# Altium PCB PCB1.PcbDoc
Units mm, origin at the board's own origin, x right, y up, seen from the top; angles counter-clockwise.
Board outline 58.5 x 41 mm, 2 copper layers (Top Layer, Bottom Layer); 36 components, 22 nets, 142 pads, 10 vias.
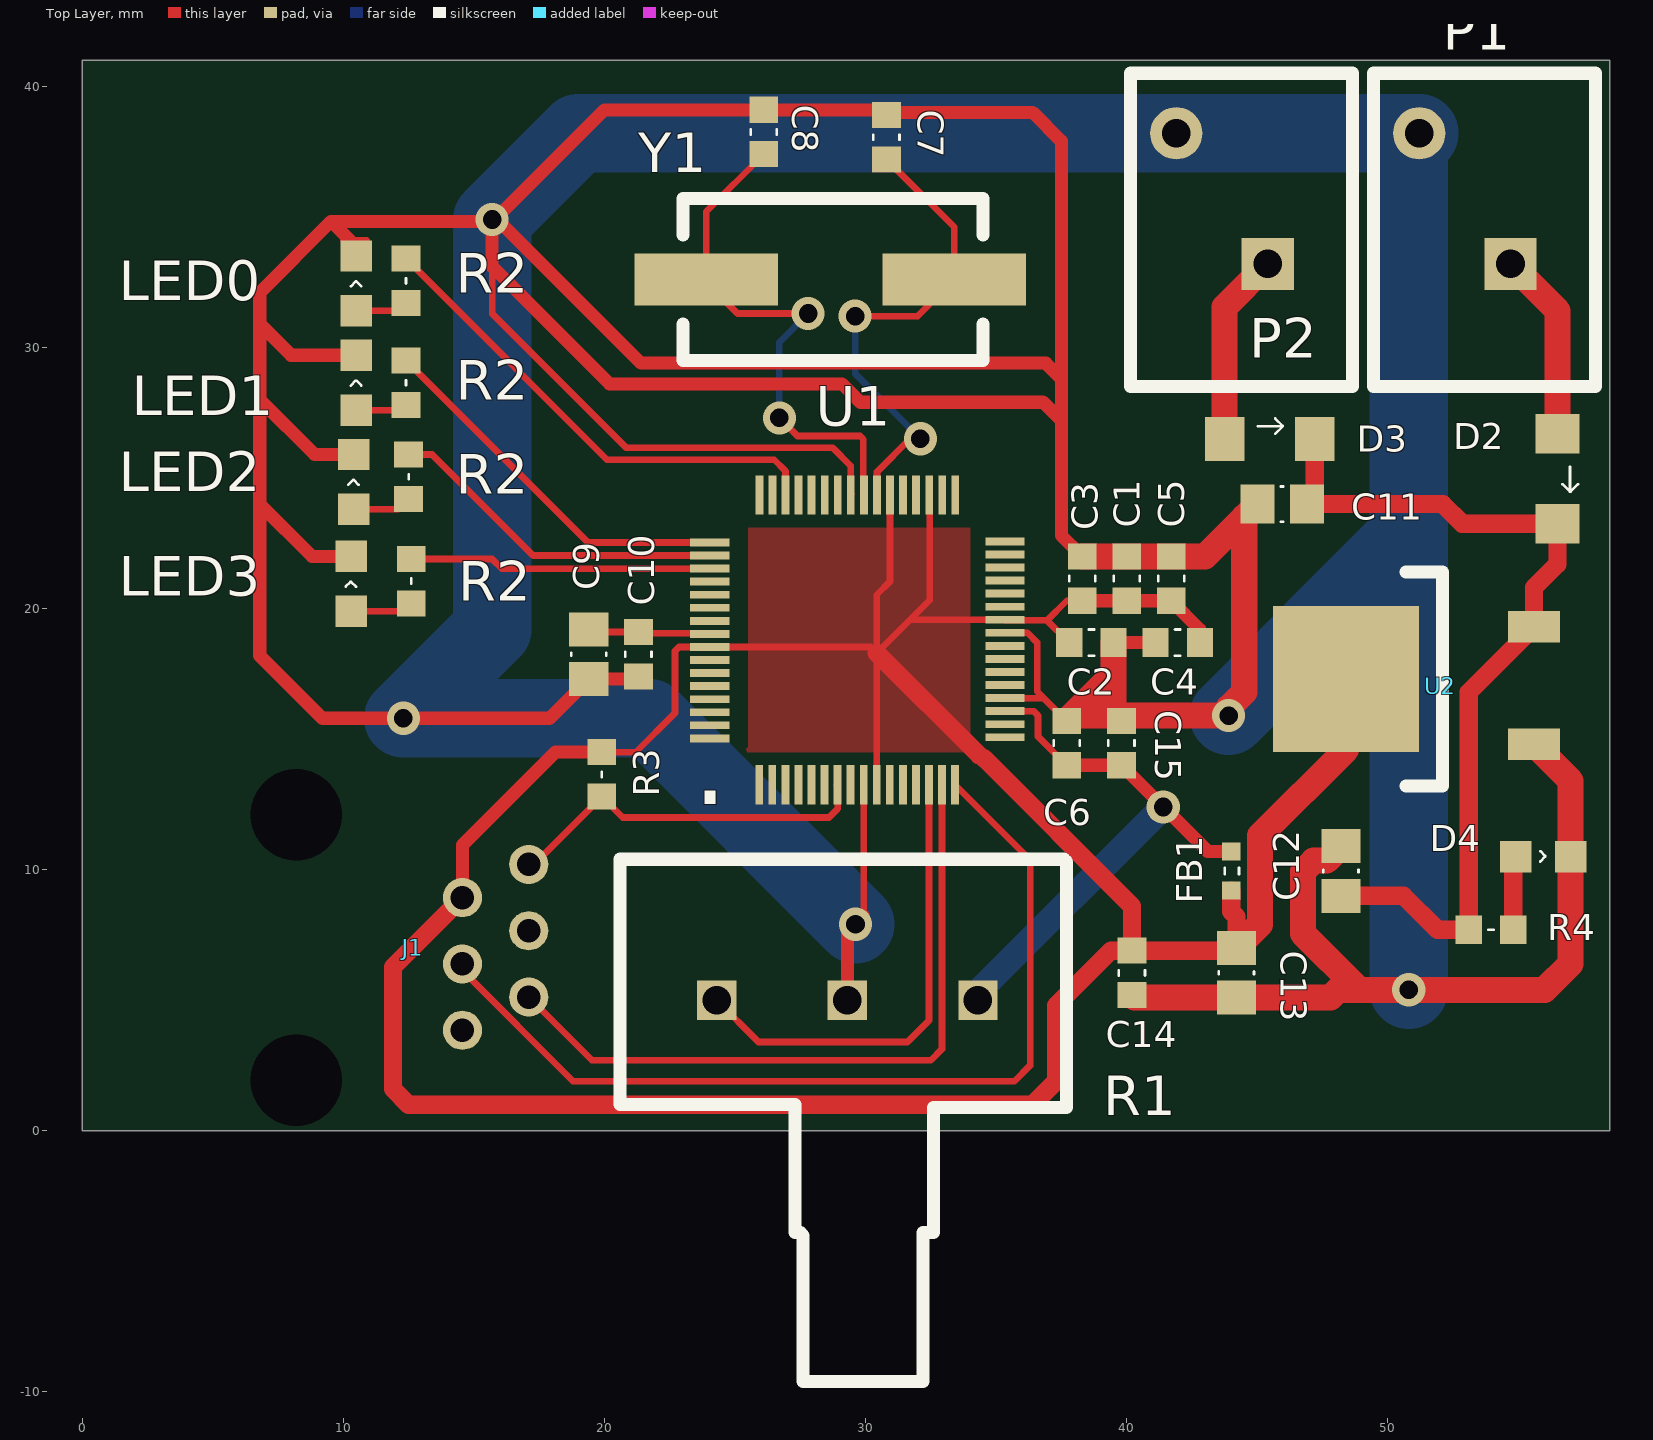
[diagram p0: Top Layer view]
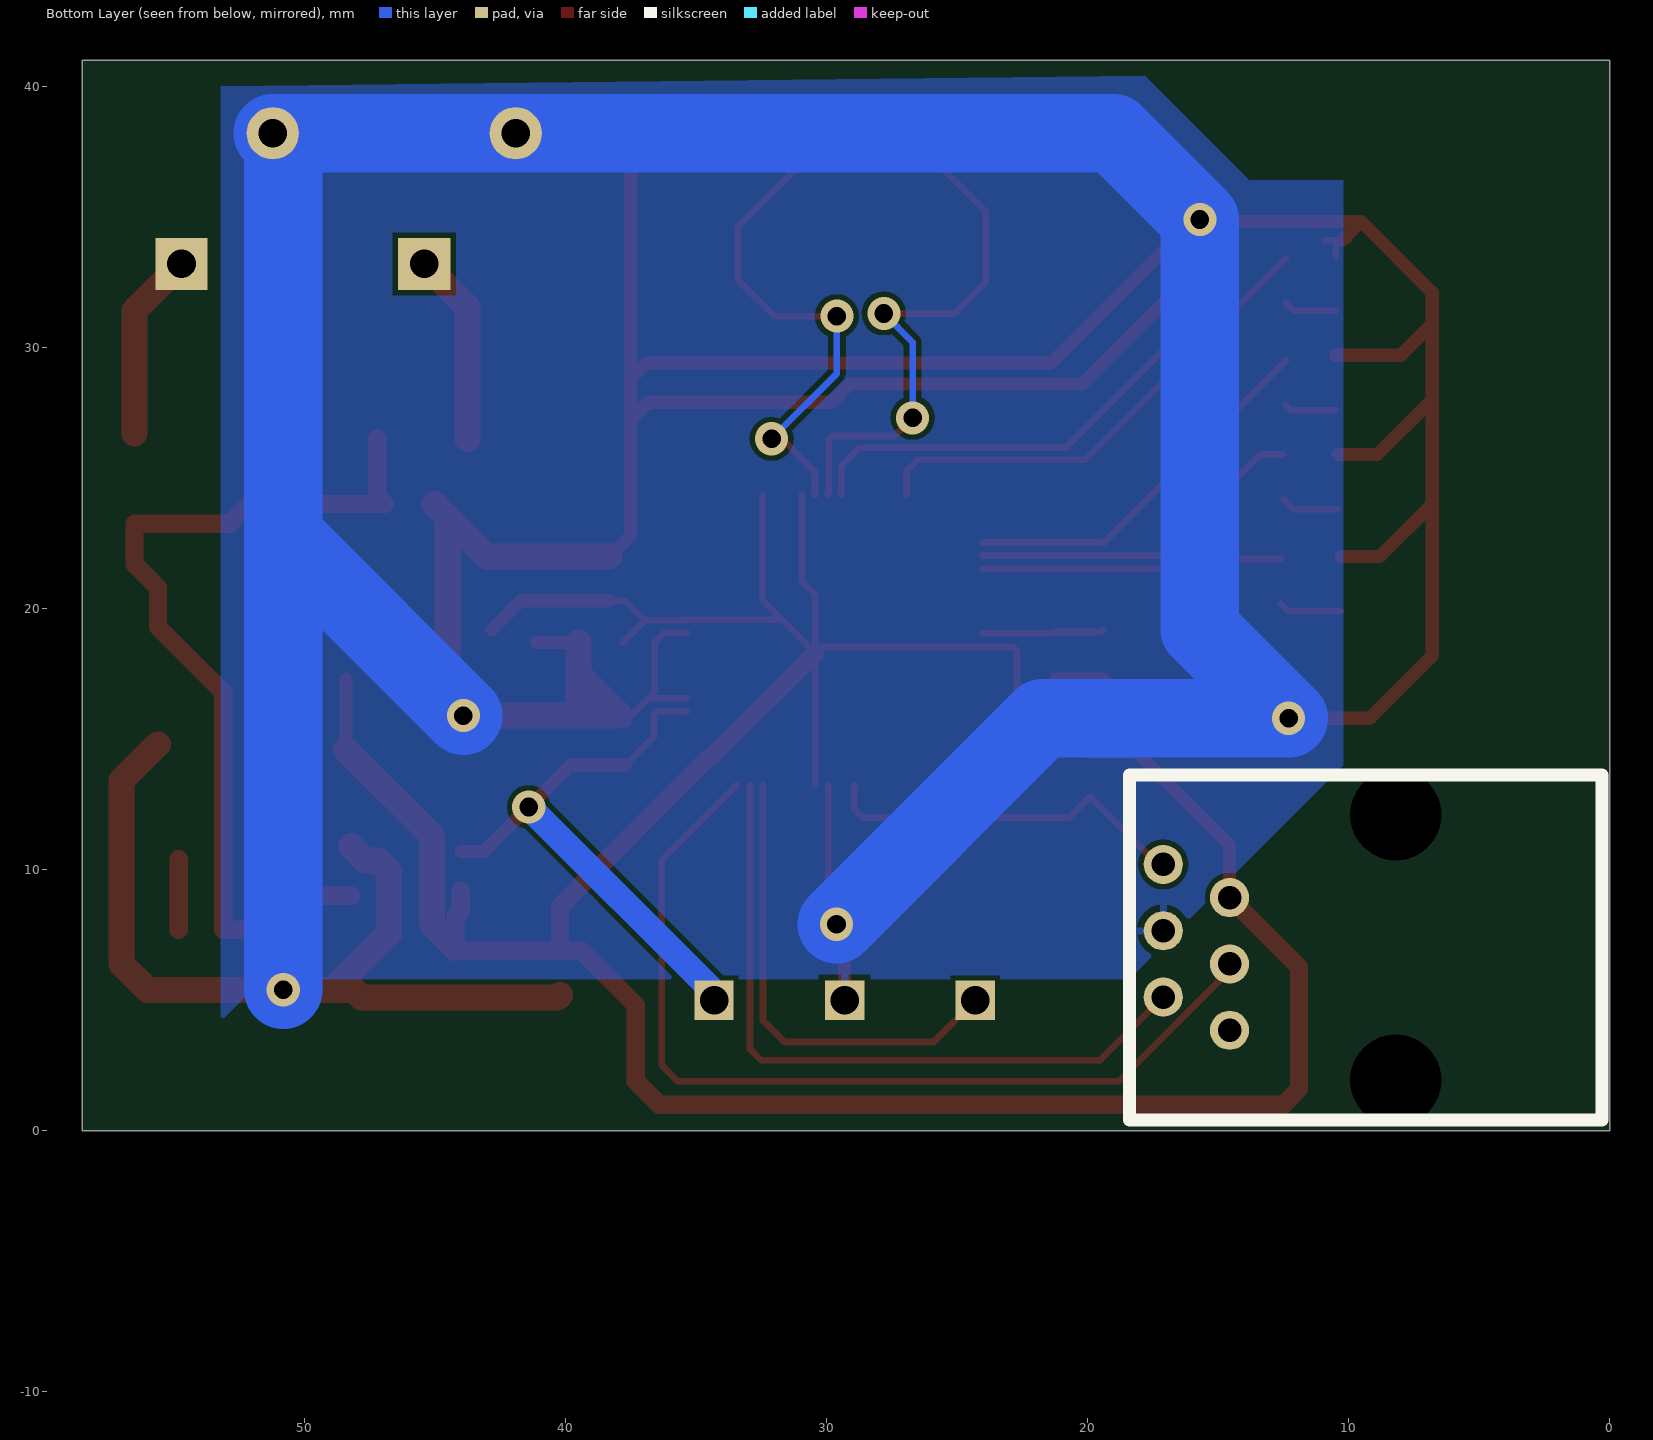
[diagram p1: Bottom Layer view, seen from below]

## Layer stack, top to bottom
Top Solder: solder mask 0.0102, Solder Resist, Dk 3.5
Top Layer: signal copper 0.0356
Dielectric 1: dielectric 0.32, FR-4, Dk 4.8
Bottom Layer: signal copper 0.0356
Bottom Solder: solder mask 0.0102, Solder Resist, Dk 3.5

## Board outline
0,0 58.5,0 58.5,41 0,41

## Design rules (kind name [scope] priority, off if disabled: settings)
Clearance [All] p1: gap=0.2
HoleSize [All] p1: absolutevalues=TRUE maxlimit=5 minlimit=0.3 maxpercent=80.000 minpercent=20.000
PolygonConnect [All] p1: connectstyle=Relief reliefconductorwidth=0.254 reliefentries=4 polygonreliefangle="90 Angle" airgapwidth=0.254
RoutingVias [All] p1: holewidth=0.711 width=1.27 viastyle="Through Hole" minholewidth=0.3 minwidth=1.27 maxholewidth=5 maxwidth=1.27
SilkToSilkClearance [All] p1: silktosilkclearance=0.1
SilkToSolderMaskClearance [IsPad] p1: minsilkscreentomaskgap=0.2 clearancetoexposedcopper=TRUE
SolderMaskExpansion [All] p1: expansion=0.102
UnpouredPolygon [All] p1: allowunpoured=FALSE
Width [All] p1: maxlimit=5 minlimit=0.2 preferedwidth=0.254
26 further rules are at their usual default settings.

## Classes and differential pairs
component class LED0: D1 R2
component class LED1: D1 R2
component class LED2: D1 R2
component class LED3: LED3 R2
component class PIC: C1 C2 C4 C6 C7 C8 C9 C10 J1 R3 U1 Y1
component class POWER: C11 C12 C13 C14 C15 D2 D3 D4 FB1 P1 P2 R4 U2
component class Sheet4: R1
net class LED[0..3]: LED0 LED1 LED2 LED3
channel class LED: LED0 LED1 LED2 LED3

## Components (designator, comment, footprint, x,y, rotation, side; value= is the part's Value field where it differs from the comment)
C1 "100nF" CAPC1608N 40,22 r270 top
C2 "100nF" CAPC1608N 39.5,18.7 r180 top
C3 "100nF" CAPC1608N 38.3,22 r270 top
C4 "100nF" CAPC1608N 41.1,18.7 r0 top
C5 "100nF" CAPC1608N 41.7,22 r270 top
C6 "100nF" CAPC1608N 37.7,15.7 r270 top
C7 "20pF" CAPC1608N 30.8,37.2 r90 top
C8 "20pF" CAPC1608N 26.1,37.4 r90 top
C9 "10uF" CAPC2012N 19.4,17.3 r90 top
C10 "1uF" CAPC1608N 21.3,17.4 r90 top
C11 "10uF" CAPC2012N 45,24 r0 top
C12 "10uF" CAPC2012N 48.2,10.9 r270 top
C13 "10uF" CAPC2012N 44.2,5.1 r90 top
C14 "1uF" CAPC1608N 40.2,5.2 r90 top
C15 "100nF" CAPC1608N 39.8,15.7 r270 top
D2 "GF1A" 214AC_21 56.5,26.7 r270 top
D3 "GF1A" 214AC_21 43.75,26.5 r0 top
D4 "Green LED" "LED 0805" 54.9,10.5 r0 top
FB1 "600r" INDC1608AN 44,9.2 r90 top
J1 "Program / Debug" RJ12_90 8.2,12.1 r270 top
LED0 "Green LED" "LED 0805" 10.5,31.4 r90 top (schematic designator D1)
LED1 "Green LED" "LED 0805" 10.5,27.6 r90 top (schematic designator D1)
LED2 "Green LED" "LED 0805" 10.4,23.8 r90 top (schematic designator D1)
LED3 "Green LED" "LED 0805" 10.3,19.9 r90 top (schematic designator D1)
P1 "12V Main" PHOENIX_1985195 54.7,33.2 r0 top
P2 "12V Battery" PHOENIX_1985195 45.4,33.2 r0 top
R1 "1K" PDB181-K415K-102A2 34.3,5 r180 top
R2 "330r" RESC1608N 12.4,31.7 r90 top
R2 "330r" RESC1608N 12.4,27.8 r90 top
R2 "330r" RESC1608N 12.5,24.2 r90 top
R2 "330r" RESC1608N 12.6,20.2 r90 top
R3 "4.7k" RESC1608N 19.9,12.8 r90 top
R4 "470r" RESC1608N 54.8,7.7 r180 top
U1 "PIC32MX764F128H-I/PT" QFP50P1200X1200X120-64 23.3,12.6 r0 top
U2 "AP1117" TD03B_N 55.6,14.8 r90 top
Y1 "8MHz" "HC49/4H SMX Crystal" 23.9,32.6 r0 top

## Footprints (in the part's own frame and the unit in brackets; to place one, negate y for a bottom-side part, rotate by r counter-clockwise, add the part's x,y. Pads: shape width x height; smd on the part's side, far side on the other; paste and mask are expansions set on the pad)
214AC_21 [mm]
  rect 1.52x1.68 smd: 1(0,0) 2(3.45,0)
  silkscreen extent 1.28,0.19 2.23,0.79
CAPC1608N [mm]
  rect 1x1.1 smd: 1(0,0) 2(1.7,0)
  silkscreen extent 0.75,-0.5 0.95,0.5
CAPC2012N [mm]
  rect 1.3x1.5 smd: 1(0,0) 2(1.9,0)
  silkscreen extent 0.9,-0.67 1,0.67
"HC49/4H SMX Crystal" [mm]
  rect 5.5x2 smd: 1(0,0) 2(9.5,0)
  silkscreen extent -0.9,-3.1 10.6,3.1
INDC1608AN [mm]
  rect 0.7x0.7 smd: 1(0,0) 2(1.5,0)
  silkscreen extent 0.63,-0.3 0.87,0.25
"LED 0805" [mm] "D1"
  rect 1.2x1.2 smd: 1(0,0) 2(2.1,0)
  silkscreen extent 0.94,-0.19 1.13,0.21
PDB181-K415K-102A2 [mm]
  rect 1.5x1.5 hole 1.1: 1(0,0) 2(5,0) 3(10,0)
  silkscreen extent -3.4,-5.4 13.7,14.6
PHOENIX_1985195 [mm]
  rect 2x2 hole 1.1: 1(0,0)
  round 2 hole 1.1: 2(-3.5,5)
  silkscreen extent -5.25,-4.7 3.25,7.3
QFP50P1200X1200X120-64 [mm]
  rect 0.3x1.5 smd: 1(2.628,0.652) 2(3.128,0.652) 3(3.628,0.652) 4(4.128,0.652) 5(4.628,0.652) 6(5.128,0.652) 7(5.628,0.652) 8(6.128,0.652) 9(6.628,0.652) 10(7.128,0.652) 11(7.628,0.652) 12(8.128,0.652) 13(8.628,0.652) 14(9.128,0.652) 15(9.628,0.652) 16(10.128,0.652) 33(10.135,11.75) 34(9.635,11.75) 35(9.135,11.75) 36(8.635,11.75) 37(8.135,11.75) 38(7.635,11.75) 39(7.135,11.75) 40(6.635,11.75) 41(6.135,11.75) 42(5.635,11.75) 43(5.135,11.75) 44(4.635,11.75) 45(4.135,11.75) 46(3.635,11.75) 47(3.135,11.75) 48(2.635,11.75)
  rect 1.5x0.3 smd: 17(12.033,2.472) 18(12.033,2.972) 19(12.033,3.472) 20(12.033,3.972) 21(12.033,4.472) 22(12.033,4.972) 23(12.033,5.472) 24(12.033,5.972) 25(12.033,6.472) 26(12.033,6.972) 27(12.033,7.472) 28(12.033,7.972) 29(12.033,8.472) 30(12.033,8.972) 31(12.033,9.472) 32(12.033,9.972) 49(0.73,9.93) 50(0.73,9.43) 51(0.73,8.93) 52(0.73,8.43) 53(0.73,7.93) 54(0.73,7.43) 55(0.73,6.93) 56(0.73,6.43) 57(0.73,5.93) 58(0.73,5.43) 59(0.73,4.93) 60(0.73,4.43) 61(0.73,3.93) 62(0.73,3.43) 63(0.73,2.93) 64(0.73,2.43)
RESC1608N [mm]
  rect 1x1.1 smd: 1(0,0) 2(1.7,0)
  silkscreen extent 0.75,0 0.95,0
RJ12_90 [mm] "1-215876-3"
  round 1.5 hole 0.9: 1(1.9,8.9) 2(3.17,6.36) 3(4.44,8.9) 4(5.71,6.36) 5(6.98,8.9) 6(8.25,6.36)
  round 0 hole 3.5: ""(0,0) ""(10.16,0)
TD03B_N [mm] "AP1117"
  rect 1.2x2 smd: 1(0,0) 3(4.5,0)
  rect 5.6x5.6 smd: 4(2.5,7.2)
  silkscreen extent -1.6,3.5 6.6,4.9

## Part data
C1 C2 C3 C4 C5 C6 C7 C8 C9 C10 C11 C12 C13 C14 C15: library part Cap, "Capacitor"
D2 D3: library part Diode, "Default Diode"
D4 LED0 LED1 LED2 LED3: library part LED0, "Typical INFRARED GaAs LED"
FB1: library part Inductor, "Inductor"
P1 P2: library part "Header 2", "Header, 2-Pin"
R1: library part RPot, "Potentiometer"
R2 R2 R2 R2 R3 R4: library part Res1, "Resistor"
Y1: library part XTAL, "Crystal Oscillator"

## Via types
v1: diameter 1.27, hole 0.711, Top Layer to Bottom Layer, 10 vias

## Nets (pads, with @x,y where several pads share a name; then routed paths per layer and width w, separated by ;. In a path a pad name is that pad's centre, name@x,y a point inside that pad or via, vN(x,y) a via of type N, cw(c..) or ccw(c..) an arc to the next point about the centre after c; other vN are vias at no path point)
ALIM: D2.1 P1.1 | length 7.2
  Top Layer w1: P1.1 56.5,31.4 D2.1
BATTERY: D3.1 P2.1 | length 7.4
  Top Layer w1: D3.1 43.75,31.55 P2.1
GND: C1.1 C2.1 C3.1 C4.1 C5.1 C6.1 C7.2 C8.2 C9.1 C10.1 C11.1 C12.1 C13.1 C14.1 C15.1 D4.2 J1.3 LED0.2 LED1.2 LED2.2 LED3.2 P1.2 P2.2 R1.2 U1.9 U1.20 U1.25 U1.41 U2.1 | length 362.9
  Top Layer w0.254: LED0.2@10,34.1 LED0.2@10.254,34.1 ; LED0.2 10.5,33.854 LED0.2@10.254,34.1 ; LED0.2@10.887,34.1 LED0.2@10.254,34.1 ; 15.7,33.1 15.7,31.3 20.846,26.154 28.746,26.154 29.435,25.465 U1.41 U1.41@29.458,24.373 ; U1.9@29.905,13.229 U1.9 v1@29.928,8.228 ; U1.25 36.195,19.072 36.567,18.7 36.567,16.833 36.8,16.6 ; U1.20@35.356,16.549 U1.20 36.772,16.572 36.8,16.6 ; C6.1 36.8,16.6
  Top Layer w0.5: LED0.2@10.254,34.1 9.527,34.827 ; LED3.2 8.8,22 6.8,24 ; LED2.2 8.9,25.9 6.8,28 ; LED1.2 8,29.7 6.8,30.9 ; C10.1@21.2,17.3 C9.1 17.9,15.8 v1(12.3,15.8) 9.2,15.8 6.8,18.2 6.8,24 ; R1.2 29.3,7.6 v1(29.614,7.914) v1@29.928,8.228 ; C6.1 C6.1@37.9,15.9 ; C3.1 37.5,22.8 37.5,27.2 ; C15.1@39.5,16 39.6,15.9 C15.1 ; C2.1 C4.1 ; 6.8,24 6.8,28 ; 6.8,28 6.8,30.9 ; 6.8,30.9 6.8,32.1 9.527,34.827 ; 9.527,34.827 v1@15.7,34.827 ; v1@15.7,34.827 15.7,33.1 20.2,28.6 29.1,28.6 29.8,27.9 36.8,27.9 37.5,27.2 ; v1@15.7,34.827 v1(15.7,34.9) v1@15.8,34.9 ; v1@15.8,34.9 15.9,34.9 21.4,29.4 36.9,29.4 37.5,28.8 ; v1@15.8,34.9 20,39.1 C8.2 30.6,39.1 30.7,39 36.4,39 37.5,37.9 37.5,28.8 ; 37.5,27.2 37.5,28.8
  Top Layer w1: C3.1 C1.1 C5.1 43,22 C11.1@44.5,23.5 ; C15.1@39.5,16 39.5,17.5 ; C2.1 39.5,17.5 ; C14.1 40.3,5.1 C13.1 47.8,5.1 48.1,5.4 48.9,5.4 ; C11.1 C11.1@44.5,23.5 ; C12.1 47.65,10.35 47.16,10.35 46.75,9.94 46.75,7.55 48.9,5.4 ; U2.1 57,13.4 D4.2 57,6.4 56,5.4 v1(50.8,5.4) 48.9,5.4 ; 39.5,17.5 37.9,15.9 39.6,15.9 v1(43.9,15.9) 43.9,16.2 44.5,16.8 C11.1@44.5,23.5
  Bottom Layer w3: v1(29.614,7.914) 21.728,15.8 v1(12.3,15.8) 15.7,19.2 v1(15.7,34.9) 19,38.2 P2.2 P1.2 50.8,37.8 50.8,22.3 ; v1(43.9,15.9) 50.3,22.3 50.8,22.3 ; v1(50.8,5.4) 50.8,22.3
LED0: R2.2@12.4,33.4 U1.46 | length 18.8
  Top Layer w0.254: R2.2@12.4,33.4 20.1,25.7 26.5,25.7 26.935,25.265 U1.46
LED1: R2.2@12.4,29.5 U1.49 | length 14.5
  Top Layer w0.254: R2.2@12.4,29.5 19.37,22.53 U1.49
LED2: R2.2@12.5,25.9 U1.50 | length 13.1
  Top Layer w0.254: R2.2@12.5,25.9 13.4,25.9 17.27,22.03 U1.50
LED3: R2.2@12.6,21.9 U1.51 | length 11.6
  Top Layer w0.254: R2.2@12.6,21.9 15.7,21.9 16.07,21.53 U1.51
MCLR: J1.1 R3.1 U1.7 | length 14.3
  Top Layer w0.254: J1.1 17.3,10.2 R3.1 20.7,12 28.6,12 28.928,12.328 U1.7 U1.7@28.905,13.229
NetC9_2: C9.2 C10.2 U1.56 | length 4.7
  Top Layer w0.254: C9.2 19.5,19.1 C10.2 21.3,19.053 24.007,19.053 U1.56
NetD1_LED0_1: LED0.1 R2.1@12.4,31.7 | length 2
  Top Layer w0.254: LED0.1 12.1,31.4 R2.1@12.4,31.7
NetD1_LED1_1: LED1.1 R2.1@12.4,27.8 | length 2
  Top Layer w0.254: LED1.1 12.2,27.6 R2.1@12.4,27.8
NetD1_LED2_1: LED2.1 R2.1@12.5,24.2 | length 2.3
  Top Layer w0.254: LED2.1 12.1,23.8 R2.1@12.5,24.2
NetD1_LED3_1: LED3.1 R2.1@12.6,20.2 | length 2.4
  Top Layer w0.254: LED3.1 12.3,19.9 R2.1@12.6,20.2
NetD4_1: D4.1 R4.1 | length 2.7
  Top Layer w0.7: R4.1 D4.1@54.8,10.4
NetR1_3: R1.3 U1.14 | length 18.2
  Top Layer w0.254: R1.3 25.9,3.4 31.6,3.4 32.428,4.228 U1.14
PGC: J1.5 U1.15 | length 27.1
  Top Layer w0.254: J1.5 19.52,2.7 32.5,2.7 32.928,3.128 U1.15
PGD: J1.4 U1.16 | length 35.9
  Top Layer w0.254: J1.4 14.56,6.137 18.797,1.9 35.7,1.9 36.3,2.5 36.3,10.38 U1.16
V3P3: C1.2 C2.2 C3.2 C4.2 C5.2 C13.2 C14.2 FB1.1 J1.2 R3.2 U1.10 U1.26 U1.35 U1.38 U1.57 U2.4 | length 128.3
  Top Layer w0.254: R3.2 21.2,14.5 22.7,16 22.7,18.376 22.854,18.53 U1.57 30.197,18.53 ; U1.10 30.428,18.299 ; U1.38 30.935,21.035 30.428,20.528 30.428,18.299 ; U1.35 32.458,24.327 32.458,20.329 31.701,19.572 ; C2.2 36.951,19.549 ; C3.2 37.702,20.3 36.951,19.549 ; 30.428,18.299 31.701,19.572 ; 31.701,19.572 U1.26 35.356,19.549 36.951,19.549
  Top Layer w0.5: J1.2 14.56,10.94 18.12,14.5 R3.2 ; C3.2 C1.2 C5.2 C4.2@42.8,19.2 ; U2.4@48.4,14.6 U2.4
  Top Layer w0.7: J1.2 11.9,6.27 11.9,1.6 12.5,1 36.4,1 37.3,1.9 37.3,4.8 39.4,6.9 C14.2 ; 30.428,18.299 34.355,14.372 ; 34.528,14.272 40.2,8.6 C14.2 ; FB1.1 44,8.4 44.2,8.2 C13.2 ; C13.2@44.262,6.9 C14.2
  Top Layer w1: C13.2 45.1,7.9 45.1,11.3 U2.4@48.4,14.6
V3P3A: C6.2 C15.2 FB1.2 R1.1 U1.19 | length 21.7
  Top Layer w0.254: U1.19@35.356,16.049 U1.19 36.428,16.072 36.6,15.9 36.6,15.1 C6.2
  Top Layer w0.5: C6.2 C15.2 43.1,10.7 FB1.2
  Bottom Layer w0.5: R1.1 R1.1@34.3,5.3
  Bottom Layer w1: R1.1@34.3,5.3 v1(41.4,12.4)
V5: C11.2 C12.2 D2.2 D3.2 R4.2 U2.3 | length 34.9
  Top Layer w0.7: D3.2 47.2,24.3 C11.2 52.1,24 52.85,23.25 D2.2 56.5,21.7 55.6,20.8 U2.3 53.1,16.8 R4.2 51.9,7.7 50.6,9 C12.2
X1: C7.1 U1.39 Y1.2 | length 18.9
  Top Layer w0.254: v1(29.6,31.2) 32,31.2 Y1.2 33.4,34.6 C7.1 ; U1.39@30.458,24.373 U1.39 30.435,25.235 31.7,26.5 v1(32.1,26.5)
  Bottom Layer w0.254: v1(29.6,31.2) 29.6,29 v1(32.1,26.5)
X2: C8.1 U1.40 Y1.1 | length 20.4
  Top Layer w0.254: C8.1 23.9,35.2 Y1.1 23.9,32.5 25.1,31.3 v1(27.8,31.3) ; v1(26.7,27.3) 27.392,26.608 29.792,26.608 29.912,26.488 29.912,24.373 U1.40 U1.40@29.958,24.373
  Bottom Layer w0.254: v1(26.7,27.3) 26.7,30.2 v1(27.8,31.3)
pads on no net: J1. J1.6 U1.1 U1.2 U1.3 U1.4 U1.5 U1.6 U1.8 U1.11 U1.12 U1.13 U1.17 U1.18 U1.21 U1.22 U1.23 U1.24 U1.27 U1.28 U1.29 U1.30 U1.31 U1.32 U1.33 U1.34 U1.36 U1.37 U1.42 U1.43 U1.44 U1.45 U1.47 U1.48 U1.52 U1.53 U1.54 U1.55 U1.58 U1.59 U1.60 U1.61 U1.62 U1.63 U1.64

## Polygon pours and split planes (outlines as drawn)
V3P3 on Top Layer "Top Layer-No Net" (solid, remove dead copper, pour order 6): 34,23.1 34,14.5 25.3,14.5 25.5,14.7 25.5,23.1
GND on Bottom Layer "Top Layer-No Net" (solid, remove dead copper, pour order 8): 53.2,40 53.2,4.2 51.6,5.8 26.4,5.8 18.4,5.8 10.2,14 10.2,36.4 13.8,36.4 17.8,40.4

## Silkscreen, mask and mechanical layers (free items; w line width, h text height)
Drill Drawing:
  lines w0.025: 62.13,19.453 62.765,19.77 63.4,19.453 63.083,20.088 63.4,20.723 62.765,20.405 62.13,20.723 62.448,20.088 62.13,19.453 ; 62.13,24.533 63.4,24.533 62.765,23.263 62.13,24.533 ; 62.13,27.39 62.448,27.39 62.448,27.073 63.083,27.073 63.083,27.39 63.4,27.39 63.4,28.025 63.083,28.025 63.083,28.343 62.448,28.343 62.448,28.025 62.13,28.025 62.13,27.39 ; 62.13,30.883 62.13,31.2 62.448,31.518 62.13,31.835 62.13,32.153 62.448,32.153 62.765,31.835 63.083,32.153 63.4,32.153 63.4,31.835 63.083,31.518 63.4,31.2 63.4,30.883 63.083,30.883 62.765,31.2 62.448,30.883 62.13,30.883
  lines w0.381: 60.4,18.31 158.926,18.31 ; 60.4,33.55 158.926,33.55 ; 74.392,14.5 74.392,37.36 ; 92.117,14.5 92.117,37.36 ; 126.295,14.5 126.295,37.36 ; 139.144,14.5 139.144,37.36 ; 60.4,14.5 158.926,14.5 158.926,37.36 60.4,37.36 60.4,14.5
  text "Symbol" at 62.686,34.693 h1.83
  text "Hit Count" at 75.535,34.693 h1.83
  text "Finished Hole Size" at 93.26,34.693 h1.83
  text "Plated" at 127.438,34.693 h1.83
  text "Hole Type" at 140.287,34.693 h1.83
  text "2" at 75.535,30.883 h1.52
  text "3.500mm (137.80mil)" at 93.26,30.883 h1.52
  text "PTH" at 127.438,30.883 h1.52
  text "Round" at 140.287,30.883 h1.52
  text "6" at 75.535,27.073 h1.52
  text "0.900mm (35.43mil)" at 93.26,27.073 h1.52
  text "PTH" at 127.438,27.073 h1.52
  text "Round" at 140.287,27.073 h1.52
  text "7" at 75.535,23.263 h1.52
  text "1.100mm (43.31mil)" at 93.26,23.263 h1.52
  text "PTH" at 127.438,23.263 h1.52
  text "Round" at 140.287,23.263 h1.52
  text "10" at 75.535,19.453 h1.52
  text "0.711mm (28.00mil)" at 93.26,19.453 h1.52
  text "PTH" at 127.438,19.453 h1.52
  text "Round" at 140.287,19.453 h1.52
  text "25 Total" at 75.535,15.643 h1.52
Dimensions:
  lines w0.254: -0.508,1.524 0,0 ; -0.508,39.222 0,40.746 ; -0.254,0 0.254,0 ; -0.254,40.746 0.254,40.746 ; 0,12.349 0,0 ; 0,28.397 0,40.746 ; 0,41.254 0,40.746 ; 0.508,1.524 0,0 ; 0.508,39.222 0,40.746 ; 1.524,40.492 0,41 ; 1.524,41.508 0,41 ; 22.75,41 0,41 ; 35.75,41 58.5,41 ; 56.976,40.492 58.5,41 ; 56.976,41.508 58.5,41 ; 58.5,40.746 58.5,41.254
  text "58.5 (mm)" at 23.004,40.086 h1.52
  text "40.746 (mm)" at -0.914,28.143 h1.52 r270
bord outline:
  the board outline again, w0.2